# Altium PCB FOOTPRINT FOR BOOTOM PART V1 (1).pcbdoc
Units mm, origin at the board's own origin, x right, y up, seen from the top; angles counter-clockwise.
Board outline 93.7 x 93.7 mm, 2 copper layers (Top Layer, Bottom Layer), stack 1.58 mm thick; 1 components, 0 nets, 0 pads, 0 vias.
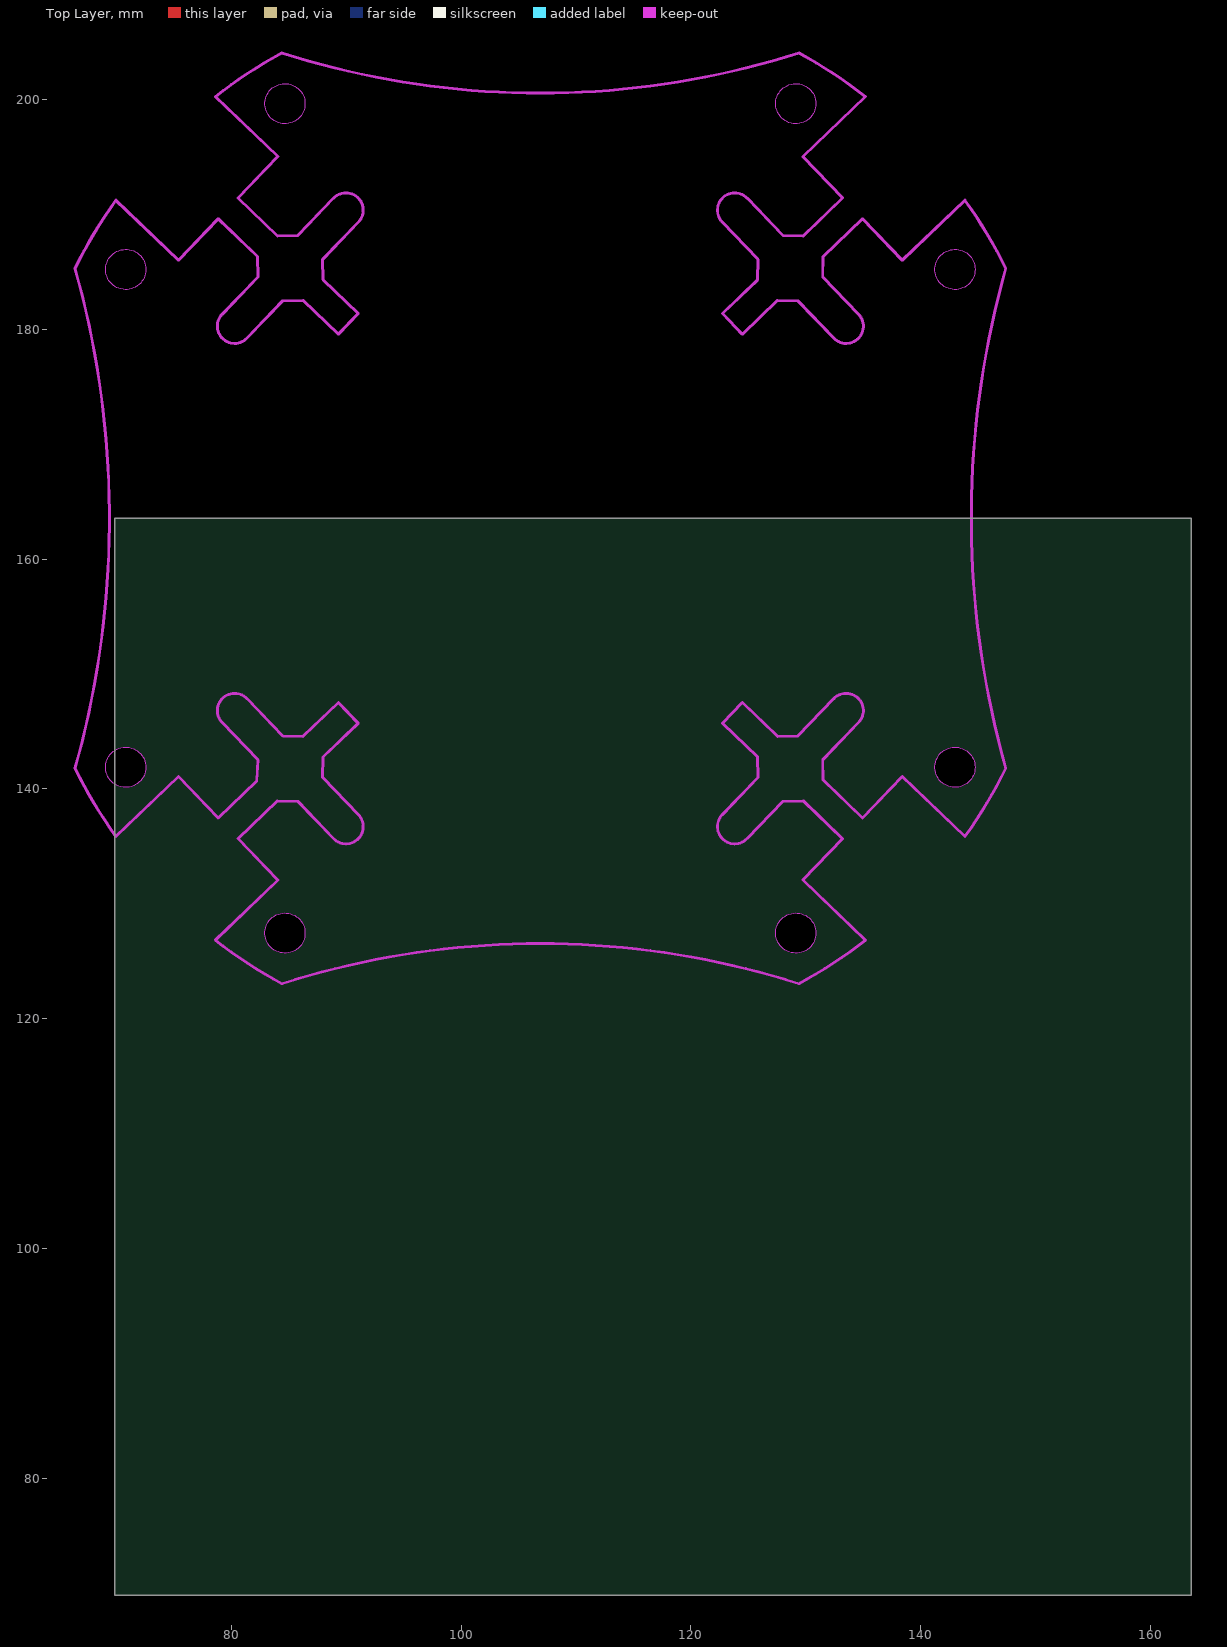
[diagram p0: Top Layer view]
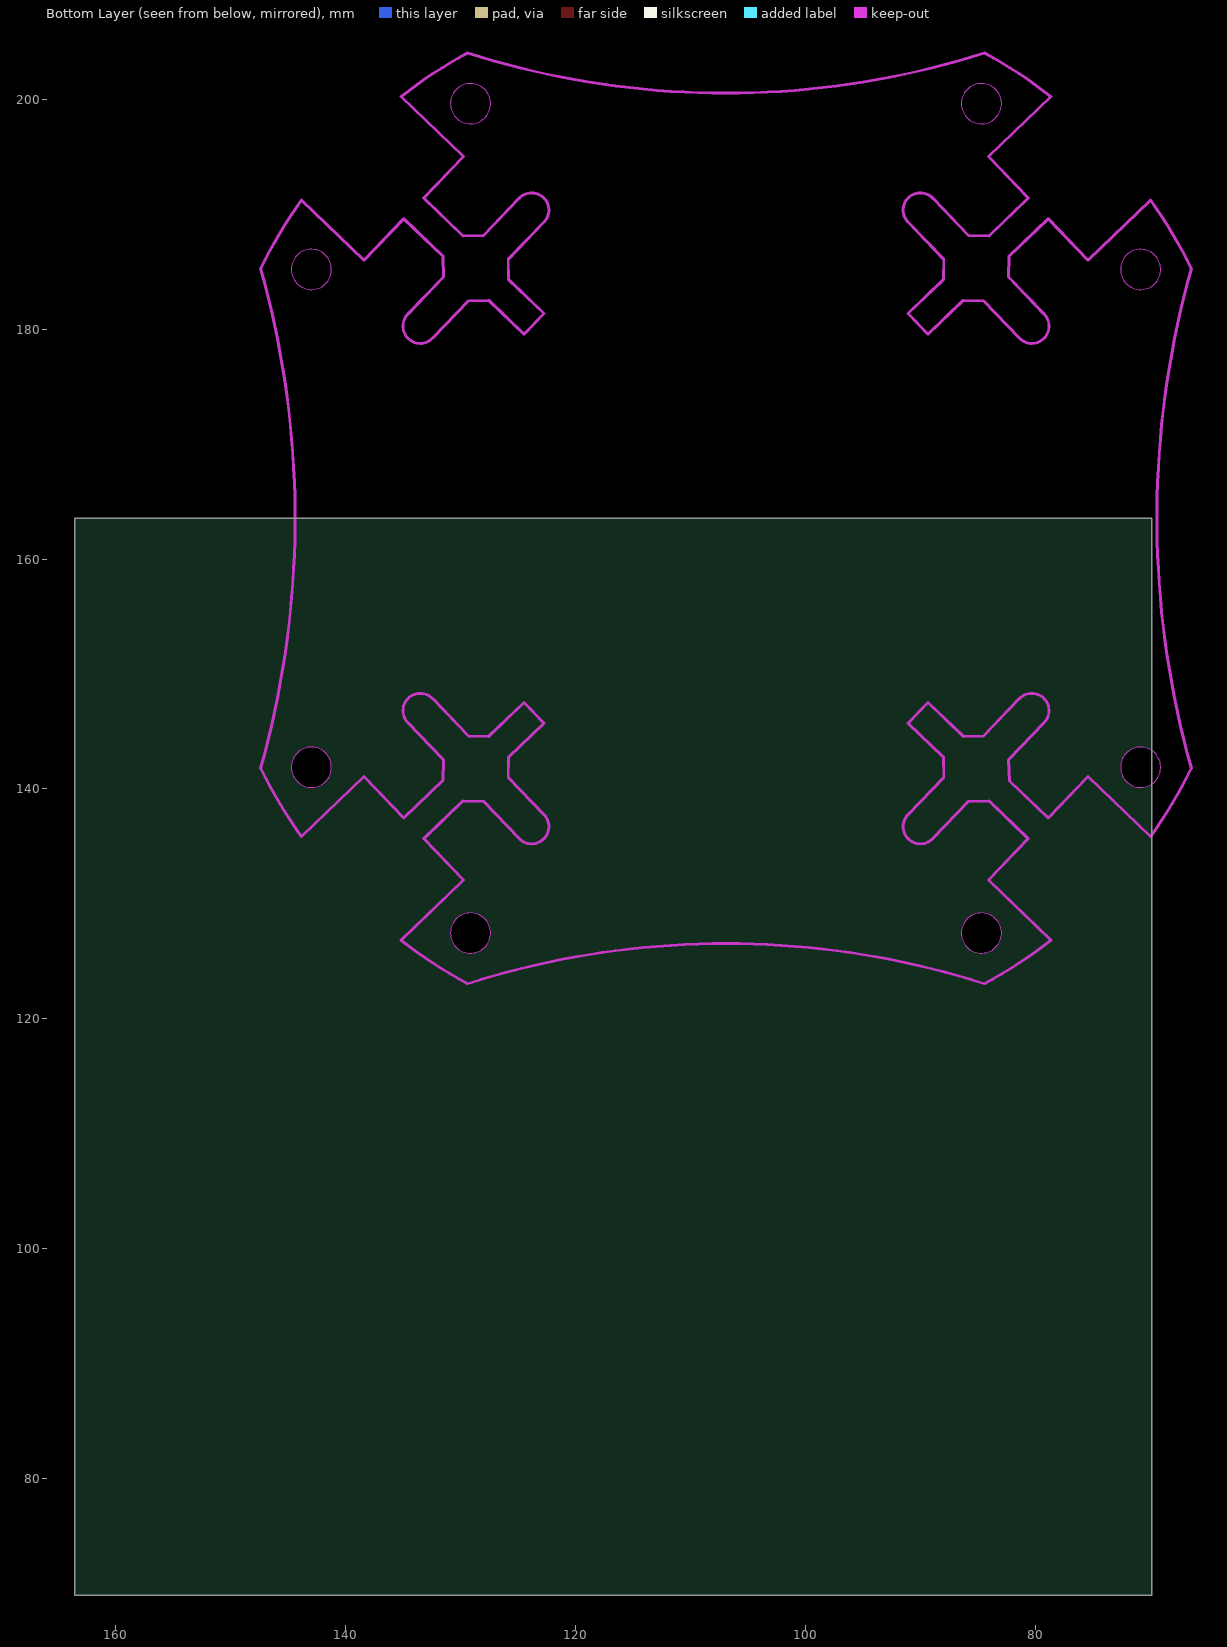
[diagram p1: Bottom Layer view, seen from below]

## Layer stack, top to bottom
Top Solder Mask Layer: solder mask 0.0102, Dk 3.3
Top Layer: signal copper 0.0356
Dielectric1: surface 1.5088, FR4, Dk 4.5
Bottom Layer: signal copper 0.0356
Bottom Solder Mask Layer: solder mask 0.0102, Dk 3.3

## Board outline
163.551,69.85 69.85,69.85 69.85,163.551 163.551,163.551

## Components (designator, comment, footprint, x,y, rotation, side; value= is the part's Value field where it differs from the comment)
? "" "FOOTPRINT FOR BOOTOM PART V1" 92.144,168.991 r0 top

## Footprints (in the part's own frame and the unit in brackets; to place one, negate y for a bottom-side part, rotate by r counter-clockwise, add the part's x,y. Pads: shape width x height; smd on the part's side, far side on the other; paste and mask are expansions set on the pad)
"FOOTPRINT FOR BOOTOM PART V1" [mm]
  Board Outline Layer drawing of 966 lines, arcs and shapes, not listed
  Board Outline Layer region: -19.578,-27.107 -19.588,-27.292 -19.616,-27.478 -19.665,-27.658 -19.733,-27.831 -19.82,-27.996 -19.924,-28.151 -20.041,-28.296 -20.175,-28.425 -20.323,-28.539 -20.48,-28.639 -20.648,-28.72 -20.823,-28.783 -21.003,-28.826 -21.189,-28.852 -21.374,-28.857 -21.56,-28.842 -21.742,-28.809 -21.92,-28.753 -22.093,-28.682 -22.255,-28.59 -22.408,-28.484 -22.548,-28.362 -22.675,-28.224 -22.786,-28.075 -22.88,-27.915 -22.957,-27.744 -23.015,-27.567 -23.056,-27.386 -23.076,-27.201 -23.076,-27.015 -23.056,-26.83 -23.015,-26.647 -22.957,-26.469 -22.88,-26.302 -22.786,-26.139 -22.675,-25.989 -22.548,-25.855 -22.408,-25.73 -22.255,-25.624 -22.093,-25.535 -21.92,-25.461 -21.742,-25.408 -21.56,-25.372 -21.374,-25.357 -21.189,-25.362 -21.003,-25.387 -20.823,-25.433 -20.648,-25.494 -20.48,-25.578 -20.323,-25.674 -20.175,-25.791 -20.041,-25.921 -19.924,-26.063 -19.82,-26.218 -19.733,-26.386 -19.665,-26.558 -19.616,-26.739 -19.588,-26.921
  Board Outline Layer region: -19.578,-27.107 -19.588,-27.292 -19.616,-27.478 -19.665,-27.658 -19.733,-27.831 -19.82,-27.996 -19.924,-28.151 -20.041,-28.296 -20.175,-28.425 -20.323,-28.539 -20.48,-28.639 -20.648,-28.72 -20.823,-28.783 -21.003,-28.826 -21.189,-28.852 -21.374,-28.857 -21.56,-28.842 -21.742,-28.809 -21.92,-28.753 -22.093,-28.682 -22.255,-28.59 -22.408,-28.484 -22.548,-28.362 -22.675,-28.224 -22.786,-28.075 -22.88,-27.915 -22.957,-27.744 -23.015,-27.567 -23.056,-27.386 -23.076,-27.201 -23.076,-27.015 -23.056,-26.83 -23.015,-26.647 -22.957,-26.469 -22.88,-26.302 -22.786,-26.139 -22.675,-25.989 -22.548,-25.855 -22.408,-25.73 -22.255,-25.624 -22.093,-25.535 -21.92,-25.461 -21.742,-25.408 -21.56,-25.372 -21.374,-25.357 -21.189,-25.362 -21.003,-25.387 -20.823,-25.433 -20.648,-25.494 -20.48,-25.578 -20.323,-25.674 -20.175,-25.791 -20.041,-25.921 -19.924,-26.063 -19.82,-26.218 -19.733,-26.386 -19.665,-26.558 -19.616,-26.739 -19.588,-26.921
  Board Outline Layer region: -19.578,16.213 -19.588,16.027 -19.616,15.845 -19.665,15.664 -19.733,15.491 -19.82,15.324 -19.924,15.169 -20.041,15.027 -20.175,14.897 -20.323,14.78 -20.48,14.684 -20.648,14.6 -20.823,14.539 -21.003,14.493 -21.189,14.468 -21.374,14.463 -21.56,14.478 -21.742,14.514 -21.92,14.567 -22.093,14.641 -22.255,14.729 -22.408,14.836 -22.548,14.961 -22.675,15.095 -22.786,15.245 -22.88,15.408 -22.957,15.575 -23.015,15.753 -23.056,15.936 -23.076,16.121 -23.076,16.307 -23.056,16.492 -23.015,16.673 -22.957,16.85 -22.88,17.021 -22.786,17.181 -22.675,17.33 -22.548,17.468 -22.408,17.59 -22.255,17.696 -22.093,17.788 -21.92,17.859 -21.742,17.915 -21.56,17.948 -21.374,17.963 -21.189,17.958 -21.003,17.932 -20.823,17.889 -20.648,17.826 -20.48,17.744 -20.323,17.645 -20.175,17.531 -20.041,17.402 -19.924,17.257 -19.82,17.102 -19.733,16.937 -19.665,16.764 -19.616,16.584 -19.588,16.398
  Board Outline Layer region: -19.578,16.213 -19.588,16.027 -19.616,15.845 -19.665,15.664 -19.733,15.491 -19.82,15.324 -19.924,15.169 -20.041,15.027 -20.175,14.897 -20.323,14.78 -20.48,14.684 -20.648,14.6 -20.823,14.539 -21.003,14.493 -21.189,14.468 -21.374,14.463 -21.56,14.478 -21.742,14.514 -21.92,14.567 -22.093,14.641 -22.255,14.729 -22.408,14.836 -22.548,14.961 -22.675,15.095 -22.786,15.245 -22.88,15.408 -22.957,15.575 -23.015,15.753 -23.056,15.936 -23.076,16.121 -23.076,16.307 -23.056,16.492 -23.015,16.673 -22.957,16.85 -22.88,17.021 -22.786,17.181 -22.675,17.33 -22.548,17.468 -22.408,17.59 -22.255,17.696 -22.093,17.788 -21.92,17.859 -21.742,17.915 -21.56,17.948 -21.374,17.963 -21.189,17.958 -21.003,17.932 -20.823,17.889 -20.648,17.826 -20.48,17.744 -20.323,17.645 -20.175,17.531 -20.041,17.402 -19.924,17.257 -19.82,17.102 -19.733,16.937 -19.665,16.764 -19.616,16.584 -19.588,16.398
  Board Outline Layer region: -5.728,30.64 -5.738,30.455 -5.766,30.272 -5.814,30.091 -5.883,29.919 -5.969,29.754 -6.073,29.599 -6.19,29.454 -6.325,29.324 -6.472,29.21 -6.629,29.111 -6.797,29.03 -6.972,28.966 -7.153,28.92 -7.338,28.898 -7.523,28.892 -7.709,28.908 -7.892,28.941 -8.07,28.994 -8.242,29.068 -8.405,29.157 -8.557,29.266 -8.697,29.388 -8.824,29.525 -8.936,29.675 -9.03,29.835 -9.106,30.005 -9.164,30.18 -9.205,30.363 -9.225,30.549 -9.225,30.734 -9.205,30.919 -9.164,31.102 -9.106,31.278 -9.03,31.448 -8.936,31.608 -8.824,31.758 -8.697,31.895 -8.557,32.017 -8.405,32.126 -8.242,32.215 -8.07,32.288 -7.892,32.342 -7.709,32.375 -7.523,32.39 -7.338,32.385 -7.153,32.36 -6.972,32.316 -6.797,32.253 -6.629,32.172 -6.472,32.073 -6.325,31.958 -6.19,31.829 -6.073,31.684 -5.969,31.529 -5.883,31.364 -5.814,31.191 -5.766,31.011 -5.738,30.828
  Board Outline Layer region: -5.728,30.64 -5.738,30.455 -5.766,30.272 -5.814,30.091 -5.883,29.919 -5.969,29.754 -6.073,29.599 -6.19,29.454 -6.325,29.324 -6.472,29.21 -6.629,29.111 -6.797,29.03 -6.972,28.966 -7.153,28.92 -7.338,28.898 -7.523,28.892 -7.709,28.908 -7.892,28.941 -8.07,28.994 -8.242,29.068 -8.405,29.157 -8.557,29.266 -8.697,29.388 -8.824,29.525 -8.936,29.675 -9.03,29.835 -9.106,30.005 -9.164,30.18 -9.205,30.363 -9.225,30.549 -9.225,30.734 -9.205,30.919 -9.164,31.102 -9.106,31.278 -9.03,31.448 -8.936,31.608 -8.824,31.758 -8.697,31.895 -8.557,32.017 -8.405,32.126 -8.242,32.215 -8.07,32.288 -7.892,32.342 -7.709,32.375 -7.523,32.39 -7.338,32.385 -7.153,32.36 -6.972,32.316 -6.797,32.253 -6.629,32.172 -6.472,32.073 -6.325,31.958 -6.19,31.829 -6.073,31.684 -5.969,31.529 -5.883,31.364 -5.814,31.191 -5.766,31.011 -5.738,30.828
  Board Outline Layer region: -5.728,-41.534 -5.738,-41.722 -5.766,-41.905 -5.814,-42.085 -5.883,-42.258 -5.969,-42.423 -6.073,-42.578 -6.19,-42.723 -6.325,-42.852 -6.472,-42.967 -6.629,-43.066 -6.797,-43.147 -6.972,-43.21 -7.153,-43.254 -7.338,-43.279 -7.523,-43.284 -7.709,-43.269 -7.892,-43.236 -8.07,-43.183 -8.242,-43.109 -8.405,-43.017 -8.557,-42.911 -8.697,-42.789 -8.824,-42.652 -8.936,-42.502 -9.03,-42.342 -9.106,-42.172 -9.164,-41.996 -9.205,-41.813 -9.225,-41.628 -9.225,-41.443 -9.205,-41.257 -9.164,-41.074 -9.106,-40.899 -9.03,-40.729 -8.936,-40.569 -8.824,-40.419 -8.697,-40.282 -8.557,-40.16 -8.405,-40.051 -8.242,-39.962 -8.07,-39.888 -7.892,-39.835 -7.709,-39.802 -7.523,-39.787 -7.338,-39.792 -7.153,-39.814 -6.972,-39.86 -6.797,-39.924 -6.629,-40.005 -6.472,-40.104 -6.325,-40.218 -6.19,-40.348 -6.073,-40.493 -5.969,-40.648 -5.883,-40.813 -5.814,-40.985 -5.766,-41.166 -5.738,-41.349
  Board Outline Layer region: -5.728,-41.534 -5.738,-41.722 -5.766,-41.905 -5.814,-42.085 -5.883,-42.258 -5.969,-42.423 -6.073,-42.578 -6.19,-42.723 -6.325,-42.852 -6.472,-42.967 -6.629,-43.066 -6.797,-43.147 -6.972,-43.21 -7.153,-43.254 -7.338,-43.279 -7.523,-43.284 -7.709,-43.269 -7.892,-43.236 -8.07,-43.183 -8.242,-43.109 -8.405,-43.017 -8.557,-42.911 -8.697,-42.789 -8.824,-42.652 -8.936,-42.502 -9.03,-42.342 -9.106,-42.172 -9.164,-41.996 -9.205,-41.813 -9.225,-41.628 -9.225,-41.443 -9.205,-41.257 -9.164,-41.074 -9.106,-40.899 -9.03,-40.729 -8.936,-40.569 -8.824,-40.419 -8.697,-40.282 -8.557,-40.16 -8.405,-40.051 -8.242,-39.962 -8.07,-39.888 -7.892,-39.835 -7.709,-39.802 -7.523,-39.787 -7.338,-39.792 -7.153,-39.814 -6.972,-39.86 -6.797,-39.924 -6.629,-40.005 -6.472,-40.104 -6.325,-40.218 -6.19,-40.348 -6.073,-40.493 -5.969,-40.648 -5.883,-40.813 -5.814,-40.985 -5.766,-41.166 -5.738,-41.349
  Board Outline Layer region: 38.732,30.64 38.725,30.455 38.694,30.272 38.646,30.091 38.578,29.919 38.491,29.754 38.39,29.599 38.27,29.454 38.136,29.324 37.991,29.21 37.831,29.111 37.663,29.03 37.488,28.966 37.308,28.92 37.122,28.898 36.937,28.892 36.751,28.908 36.568,28.941 36.391,28.994 36.218,29.068 36.055,29.157 35.903,29.266 35.763,29.388 35.636,29.525 35.524,29.675 35.43,29.835 35.354,30.005 35.296,30.18 35.255,30.363 35.235,30.549 35.235,30.734 35.255,30.919 35.296,31.102 35.354,31.278 35.43,31.448 35.524,31.608 35.636,31.758 35.763,31.895 35.903,32.017 36.055,32.126 36.218,32.215 36.391,32.288 36.568,32.342 36.751,32.375 36.937,32.39 37.122,32.385 37.308,32.36 37.488,32.316 37.663,32.253 37.831,32.172 37.991,32.073 38.136,31.958 38.27,31.829 38.39,31.684 38.491,31.529 38.578,31.364 38.646,31.191 38.694,31.011 38.725,30.828
  Board Outline Layer region: 38.732,30.64 38.725,30.455 38.694,30.272 38.646,30.091 38.578,29.919 38.491,29.754 38.39,29.599 38.27,29.454 38.136,29.324 37.991,29.21 37.831,29.111 37.663,29.03 37.488,28.966 37.308,28.92 37.122,28.898 36.937,28.892 36.751,28.908 36.568,28.941 36.391,28.994 36.218,29.068 36.055,29.157 35.903,29.266 35.763,29.388 35.636,29.525 35.524,29.675 35.43,29.835 35.354,30.005 35.296,30.18 35.255,30.363 35.235,30.549 35.235,30.734 35.255,30.919 35.296,31.102 35.354,31.278 35.43,31.448 35.524,31.608 35.636,31.758 35.763,31.895 35.903,32.017 36.055,32.126 36.218,32.215 36.391,32.288 36.568,32.342 36.751,32.375 36.937,32.39 37.122,32.385 37.308,32.36 37.488,32.316 37.663,32.253 37.831,32.172 37.991,32.073 38.136,31.958 38.27,31.829 38.39,31.684 38.491,31.529 38.578,31.364 38.646,31.191 38.694,31.011 38.725,30.828
  Board Outline Layer region: 38.732,-41.534 38.725,-41.722 38.694,-41.905 38.646,-42.085 38.578,-42.258 38.491,-42.423 38.39,-42.578 38.27,-42.723 38.136,-42.852 37.991,-42.967 37.831,-43.066 37.663,-43.147 37.488,-43.21 37.308,-43.254 37.122,-43.279 36.937,-43.284 36.751,-43.269 36.568,-43.236 36.391,-43.183 36.218,-43.109 36.055,-43.017 35.903,-42.911 35.763,-42.789 35.636,-42.652 35.524,-42.502 35.43,-42.342 35.354,-42.172 35.296,-41.996 35.255,-41.813 35.235,-41.628 35.235,-41.443 35.255,-41.257 35.296,-41.074 35.354,-40.899 35.43,-40.729 35.524,-40.569 35.636,-40.419 35.763,-40.282 35.903,-40.16 36.055,-40.051 36.218,-39.962 36.391,-39.888 36.568,-39.835 36.751,-39.802 36.937,-39.787 37.122,-39.792 37.308,-39.814 37.488,-39.86 37.663,-39.924 37.831,-40.005 37.991,-40.104 38.136,-40.218 38.27,-40.348 38.39,-40.493 38.491,-40.648 38.578,-40.813 38.646,-40.985 38.694,-41.166 38.725,-41.349
  Board Outline Layer region: 38.732,-41.534 38.725,-41.722 38.694,-41.905 38.646,-42.085 38.578,-42.258 38.491,-42.423 38.39,-42.578 38.27,-42.723 38.136,-42.852 37.991,-42.967 37.831,-43.066 37.663,-43.147 37.488,-43.21 37.308,-43.254 37.122,-43.279 36.937,-43.284 36.751,-43.269 36.568,-43.236 36.391,-43.183 36.218,-43.109 36.055,-43.017 35.903,-42.911 35.763,-42.789 35.636,-42.652 35.524,-42.502 35.43,-42.342 35.354,-42.172 35.296,-41.996 35.255,-41.813 35.235,-41.628 35.235,-41.443 35.255,-41.257 35.296,-41.074 35.354,-40.899 35.43,-40.729 35.524,-40.569 35.636,-40.419 35.763,-40.282 35.903,-40.16 36.055,-40.051 36.218,-39.962 36.391,-39.888 36.568,-39.835 36.751,-39.802 36.937,-39.787 37.122,-39.792 37.308,-39.814 37.488,-39.86 37.663,-39.924 37.831,-40.005 37.991,-40.104 38.136,-40.218 38.27,-40.348 38.39,-40.493 38.491,-40.648 38.578,-40.813 38.646,-40.985 38.694,-41.166 38.725,-41.349
  Board Outline Layer region: 52.583,-27.107 52.575,-27.292 52.545,-27.478 52.497,-27.658 52.428,-27.831 52.342,-27.996 52.24,-28.151 52.121,-28.296 51.986,-28.425 51.841,-28.539 51.681,-28.639 51.514,-28.72 51.338,-28.783 51.158,-28.826 50.973,-28.852 50.787,-28.857 50.602,-28.842 50.419,-28.809 50.241,-28.753 50.068,-28.682 49.906,-28.59 49.754,-28.484 49.614,-28.362 49.487,-28.224 49.375,-28.075 49.281,-27.915 49.205,-27.744 49.146,-27.567 49.106,-27.386 49.088,-27.201 49.088,-27.015 49.106,-26.83 49.146,-26.647 49.205,-26.469 49.281,-26.302 49.375,-26.139 49.487,-25.989 49.614,-25.855 49.754,-25.73 49.906,-25.624 50.068,-25.535 50.241,-25.461 50.419,-25.408 50.602,-25.372 50.787,-25.357 50.973,-25.362 51.158,-25.387 51.338,-25.433 51.514,-25.494 51.681,-25.578 51.841,-25.674 51.986,-25.791 52.121,-25.921 52.24,-26.063 52.342,-26.218 52.428,-26.386 52.497,-26.558 52.545,-26.739 52.575,-26.921
  Board Outline Layer region: 52.583,-27.107 52.575,-27.292 52.545,-27.478 52.497,-27.658 52.428,-27.831 52.342,-27.996 52.24,-28.151 52.121,-28.296 51.986,-28.425 51.841,-28.539 51.681,-28.639 51.514,-28.72 51.338,-28.783 51.158,-28.826 50.973,-28.852 50.787,-28.857 50.602,-28.842 50.419,-28.809 50.241,-28.753 50.068,-28.682 49.906,-28.59 49.754,-28.484 49.614,-28.362 49.487,-28.224 49.375,-28.075 49.281,-27.915 49.205,-27.744 49.146,-27.567 49.106,-27.386 49.088,-27.201 49.088,-27.015 49.106,-26.83 49.146,-26.647 49.205,-26.469 49.281,-26.302 49.375,-26.139 49.487,-25.989 49.614,-25.855 49.754,-25.73 49.906,-25.624 50.068,-25.535 50.241,-25.461 50.419,-25.408 50.602,-25.372 50.787,-25.357 50.973,-25.362 51.158,-25.387 51.338,-25.433 51.514,-25.494 51.681,-25.578 51.841,-25.674 51.986,-25.791 52.121,-25.921 52.24,-26.063 52.342,-26.218 52.428,-26.386 52.497,-26.558 52.545,-26.739 52.575,-26.921
  Board Outline Layer region: 52.583,16.213 52.575,16.027 52.545,15.845 52.497,15.664 52.428,15.491 52.342,15.324 52.24,15.169 52.121,15.027 51.986,14.897 51.841,14.78 51.681,14.684 51.514,14.6 51.338,14.539 51.158,14.493 50.973,14.468 50.787,14.463 50.602,14.478 50.419,14.514 50.241,14.567 50.068,14.641 49.906,14.729 49.754,14.836 49.614,14.961 49.487,15.095 49.375,15.245 49.281,15.408 49.205,15.575 49.146,15.753 49.106,15.936 49.088,16.121 49.088,16.307 49.106,16.492 49.146,16.673 49.205,16.85 49.281,17.021 49.375,17.181 49.487,17.33 49.614,17.468 49.754,17.59 49.906,17.696 50.068,17.788 50.241,17.859 50.419,17.915 50.602,17.948 50.787,17.963 50.973,17.958 51.158,17.932 51.338,17.889 51.514,17.826 51.681,17.744 51.841,17.645 51.986,17.531 52.121,17.402 52.24,17.257 52.342,17.102 52.428,16.937 52.497,16.764 52.545,16.584 52.575,16.398
  Board Outline Layer region: 52.583,16.213 52.575,16.027 52.545,15.845 52.497,15.664 52.428,15.491 52.342,15.324 52.24,15.169 52.121,15.027 51.986,14.897 51.841,14.78 51.681,14.684 51.514,14.6 51.338,14.539 51.158,14.493 50.973,14.468 50.787,14.463 50.602,14.478 50.419,14.514 50.241,14.567 50.068,14.641 49.906,14.729 49.754,14.836 49.614,14.961 49.487,15.095 49.375,15.245 49.281,15.408 49.205,15.575 49.146,15.753 49.106,15.936 49.088,16.121 49.088,16.307 49.106,16.492 49.146,16.673 49.205,16.85 49.281,17.021 49.375,17.181 49.487,17.33 49.614,17.468 49.754,17.59 49.906,17.696 50.068,17.788 50.241,17.859 50.419,17.915 50.602,17.948 50.787,17.963 50.973,17.958 51.158,17.932 51.338,17.889 51.514,17.826 51.681,17.744 51.841,17.645 51.986,17.531 52.121,17.402 52.24,17.257 52.342,17.102 52.428,16.937 52.497,16.764 52.545,16.584 52.575,16.398
  Multi-Layer board cut-out: -19.578,-27.107 -19.588,-27.292 -19.616,-27.478 -19.665,-27.658 -19.733,-27.831 -19.82,-27.996 -19.924,-28.151 -20.041,-28.296 -20.175,-28.425 -20.323,-28.539 -20.48,-28.639 -20.648,-28.72 -20.823,-28.783 -21.003,-28.826 -21.189,-28.852 -21.374,-28.857 -21.56,-28.842 -21.742,-28.809 -21.92,-28.753 -22.093,-28.682 -22.255,-28.59 -22.408,-28.484 -22.548,-28.362 -22.675,-28.224 -22.786,-28.075 -22.88,-27.915 -22.957,-27.744 -23.015,-27.567 -23.056,-27.386 -23.076,-27.201 -23.076,-27.015 -23.056,-26.83 -23.015,-26.647 -22.957,-26.469 -22.88,-26.302 -22.786,-26.139 -22.675,-25.989 -22.548,-25.855 -22.408,-25.73 -22.255,-25.624 -22.093,-25.535 -21.92,-25.461 -21.742,-25.408 -21.56,-25.372 -21.374,-25.357 -21.189,-25.362 -21.003,-25.387 -20.823,-25.433 -20.648,-25.494 -20.48,-25.578 -20.323,-25.674 -20.175,-25.791 -20.041,-25.921 -19.924,-26.063 -19.82,-26.218 -19.733,-26.386 -19.665,-26.558 -19.616,-26.739 -19.588,-26.921
  Multi-Layer board cut-out: -19.578,16.213 -19.588,16.027 -19.616,15.845 -19.665,15.664 -19.733,15.491 -19.82,15.324 -19.924,15.169 -20.041,15.027 -20.175,14.897 -20.323,14.78 -20.48,14.684 -20.648,14.6 -20.823,14.539 -21.003,14.493 -21.189,14.468 -21.374,14.463 -21.56,14.478 -21.742,14.514 -21.92,14.567 -22.093,14.641 -22.255,14.729 -22.408,14.836 -22.548,14.961 -22.675,15.095 -22.786,15.245 -22.88,15.408 -22.957,15.575 -23.015,15.753 -23.056,15.936 -23.076,16.121 -23.076,16.307 -23.056,16.492 -23.015,16.673 -22.957,16.85 -22.88,17.021 -22.786,17.181 -22.675,17.33 -22.548,17.468 -22.408,17.59 -22.255,17.696 -22.093,17.788 -21.92,17.859 -21.742,17.915 -21.56,17.948 -21.374,17.963 -21.189,17.958 -21.003,17.932 -20.823,17.889 -20.648,17.826 -20.48,17.744 -20.323,17.645 -20.175,17.531 -20.041,17.402 -19.924,17.257 -19.82,17.102 -19.733,16.937 -19.665,16.764 -19.616,16.584 -19.588,16.398
  Multi-Layer board cut-out: -5.728,30.64 -5.738,30.455 -5.766,30.272 -5.814,30.091 -5.883,29.919 -5.969,29.754 -6.073,29.599 -6.19,29.454 -6.325,29.324 -6.472,29.21 -6.629,29.111 -6.797,29.03 -6.972,28.966 -7.153,28.92 -7.338,28.898 -7.523,28.892 -7.709,28.908 -7.892,28.941 -8.07,28.994 -8.242,29.068 -8.405,29.157 -8.557,29.266 -8.697,29.388 -8.824,29.525 -8.936,29.675 -9.03,29.835 -9.106,30.005 -9.164,30.18 -9.205,30.363 -9.225,30.549 -9.225,30.734 -9.205,30.919 -9.164,31.102 -9.106,31.278 -9.03,31.448 -8.936,31.608 -8.824,31.758 -8.697,31.895 -8.557,32.017 -8.405,32.126 -8.242,32.215 -8.07,32.288 -7.892,32.342 -7.709,32.375 -7.523,32.39 -7.338,32.385 -7.153,32.36 -6.972,32.316 -6.797,32.253 -6.629,32.172 -6.472,32.073 -6.325,31.958 -6.19,31.829 -6.073,31.684 -5.969,31.529 -5.883,31.364 -5.814,31.191 -5.766,31.011 -5.738,30.828
  Multi-Layer board cut-out: -5.728,-41.534 -5.738,-41.722 -5.766,-41.905 -5.814,-42.085 -5.883,-42.258 -5.969,-42.423 -6.073,-42.578 -6.19,-42.723 -6.325,-42.852 -6.472,-42.967 -6.629,-43.066 -6.797,-43.147 -6.972,-43.21 -7.153,-43.254 -7.338,-43.279 -7.523,-43.284 -7.709,-43.269 -7.892,-43.236 -8.07,-43.183 -8.242,-43.109 -8.405,-43.017 -8.557,-42.911 -8.697,-42.789 -8.824,-42.652 -8.936,-42.502 -9.03,-42.342 -9.106,-42.172 -9.164,-41.996 -9.205,-41.813 -9.225,-41.628 -9.225,-41.443 -9.205,-41.257 -9.164,-41.074 -9.106,-40.899 -9.03,-40.729 -8.936,-40.569 -8.824,-40.419 -8.697,-40.282 -8.557,-40.16 -8.405,-40.051 -8.242,-39.962 -8.07,-39.888 -7.892,-39.835 -7.709,-39.802 -7.523,-39.787 -7.338,-39.792 -7.153,-39.814 -6.972,-39.86 -6.797,-39.924 -6.629,-40.005 -6.472,-40.104 -6.325,-40.218 -6.19,-40.348 -6.073,-40.493 -5.969,-40.648 -5.883,-40.813 -5.814,-40.985 -5.766,-41.166 -5.738,-41.349
  Multi-Layer board cut-out: 38.732,30.64 38.725,30.455 38.694,30.272 38.646,30.091 38.578,29.919 38.491,29.754 38.39,29.599 38.27,29.454 38.136,29.324 37.991,29.21 37.831,29.111 37.663,29.03 37.488,28.966 37.308,28.92 37.122,28.898 36.937,28.892 36.751,28.908 36.568,28.941 36.391,28.994 36.218,29.068 36.055,29.157 35.903,29.266 35.763,29.388 35.636,29.525 35.524,29.675 35.43,29.835 35.354,30.005 35.296,30.18 35.255,30.363 35.235,30.549 35.235,30.734 35.255,30.919 35.296,31.102 35.354,31.278 35.43,31.448 35.524,31.608 35.636,31.758 35.763,31.895 35.903,32.017 36.055,32.126 36.218,32.215 36.391,32.288 36.568,32.342 36.751,32.375 36.937,32.39 37.122,32.385 37.308,32.36 37.488,32.316 37.663,32.253 37.831,32.172 37.991,32.073 38.136,31.958 38.27,31.829 38.39,31.684 38.491,31.529 38.578,31.364 38.646,31.191 38.694,31.011 38.725,30.828
  Multi-Layer board cut-out: 38.732,-41.534 38.725,-41.722 38.694,-41.905 38.646,-42.085 38.578,-42.258 38.491,-42.423 38.39,-42.578 38.27,-42.723 38.136,-42.852 37.991,-42.967 37.831,-43.066 37.663,-43.147 37.488,-43.21 37.308,-43.254 37.122,-43.279 36.937,-43.284 36.751,-43.269 36.568,-43.236 36.391,-43.183 36.218,-43.109 36.055,-43.017 35.903,-42.911 35.763,-42.789 35.636,-42.652 35.524,-42.502 35.43,-42.342 35.354,-42.172 35.296,-41.996 35.255,-41.813 35.235,-41.628 35.235,-41.443 35.255,-41.257 35.296,-41.074 35.354,-40.899 35.43,-40.729 35.524,-40.569 35.636,-40.419 35.763,-40.282 35.903,-40.16 36.055,-40.051 36.218,-39.962 36.391,-39.888 36.568,-39.835 36.751,-39.802 36.937,-39.787 37.122,-39.792 37.308,-39.814 37.488,-39.86 37.663,-39.924 37.831,-40.005 37.991,-40.104 38.136,-40.218 38.27,-40.348 38.39,-40.493 38.491,-40.648 38.578,-40.813 38.646,-40.985 38.694,-41.166 38.725,-41.349
  Multi-Layer board cut-out: 52.583,-27.107 52.575,-27.292 52.545,-27.478 52.497,-27.658 52.428,-27.831 52.342,-27.996 52.24,-28.151 52.121,-28.296 51.986,-28.425 51.841,-28.539 51.681,-28.639 51.514,-28.72 51.338,-28.783 51.158,-28.826 50.973,-28.852 50.787,-28.857 50.602,-28.842 50.419,-28.809 50.241,-28.753 50.068,-28.682 49.906,-28.59 49.754,-28.484 49.614,-28.362 49.487,-28.224 49.375,-28.075 49.281,-27.915 49.205,-27.744 49.146,-27.567 49.106,-27.386 49.088,-27.201 49.088,-27.015 49.106,-26.83 49.146,-26.647 49.205,-26.469 49.281,-26.302 49.375,-26.139 49.487,-25.989 49.614,-25.855 49.754,-25.73 49.906,-25.624 50.068,-25.535 50.241,-25.461 50.419,-25.408 50.602,-25.372 50.787,-25.357 50.973,-25.362 51.158,-25.387 51.338,-25.433 51.514,-25.494 51.681,-25.578 51.841,-25.674 51.986,-25.791 52.121,-25.921 52.24,-26.063 52.342,-26.218 52.428,-26.386 52.497,-26.558 52.545,-26.739 52.575,-26.921
  Multi-Layer board cut-out: 52.583,16.213 52.575,16.027 52.545,15.845 52.497,15.664 52.428,15.491 52.342,15.324 52.24,15.169 52.121,15.027 51.986,14.897 51.841,14.78 51.681,14.684 51.514,14.6 51.338,14.539 51.158,14.493 50.973,14.468 50.787,14.463 50.602,14.478 50.419,14.514 50.241,14.567 50.068,14.641 49.906,14.729 49.754,14.836 49.614,14.961 49.487,15.095 49.375,15.245 49.281,15.408 49.205,15.575 49.146,15.753 49.106,15.936 49.088,16.121 49.088,16.307 49.106,16.492 49.146,16.673 49.205,16.85 49.281,17.021 49.375,17.181 49.487,17.33 49.614,17.468 49.754,17.59 49.906,17.696 50.068,17.788 50.241,17.859 50.419,17.915 50.602,17.948 50.787,17.963 50.973,17.958 51.158,17.932 51.338,17.889 51.514,17.826 51.681,17.744 51.841,17.645 51.986,17.531 52.121,17.402 52.24,17.257 52.342,17.102 52.428,16.937 52.497,16.764 52.545,16.584 52.575,16.398

## Nets (pads, with @x,y where several pads share a name; then routed paths per layer and width w, separated by ;. In a path a pad name is that pad's centre, name@x,y a point inside that pad or via, vN(x,y) a via of type N, cw(c..) or ccw(c..) an arc to the next point about the centre after c; other vN are vias at no path point)